# Altium PCB ZYNQ7020_AD9364_V2.PcbDoc (part 2 of 3)
Units mil, origin at the board's own origin, x right, y up, seen from the top; angles counter-clockwise.
Board outline 6000 x 4000 mil, 4 copper layers (Top Layer, Layer 1, Layer 2, Bottom Layer), stack 23.756 mil thick; 294 components, 275 nets, 1509 pads, 328 vias.
Unrouted connection lines stored in the file: 993.
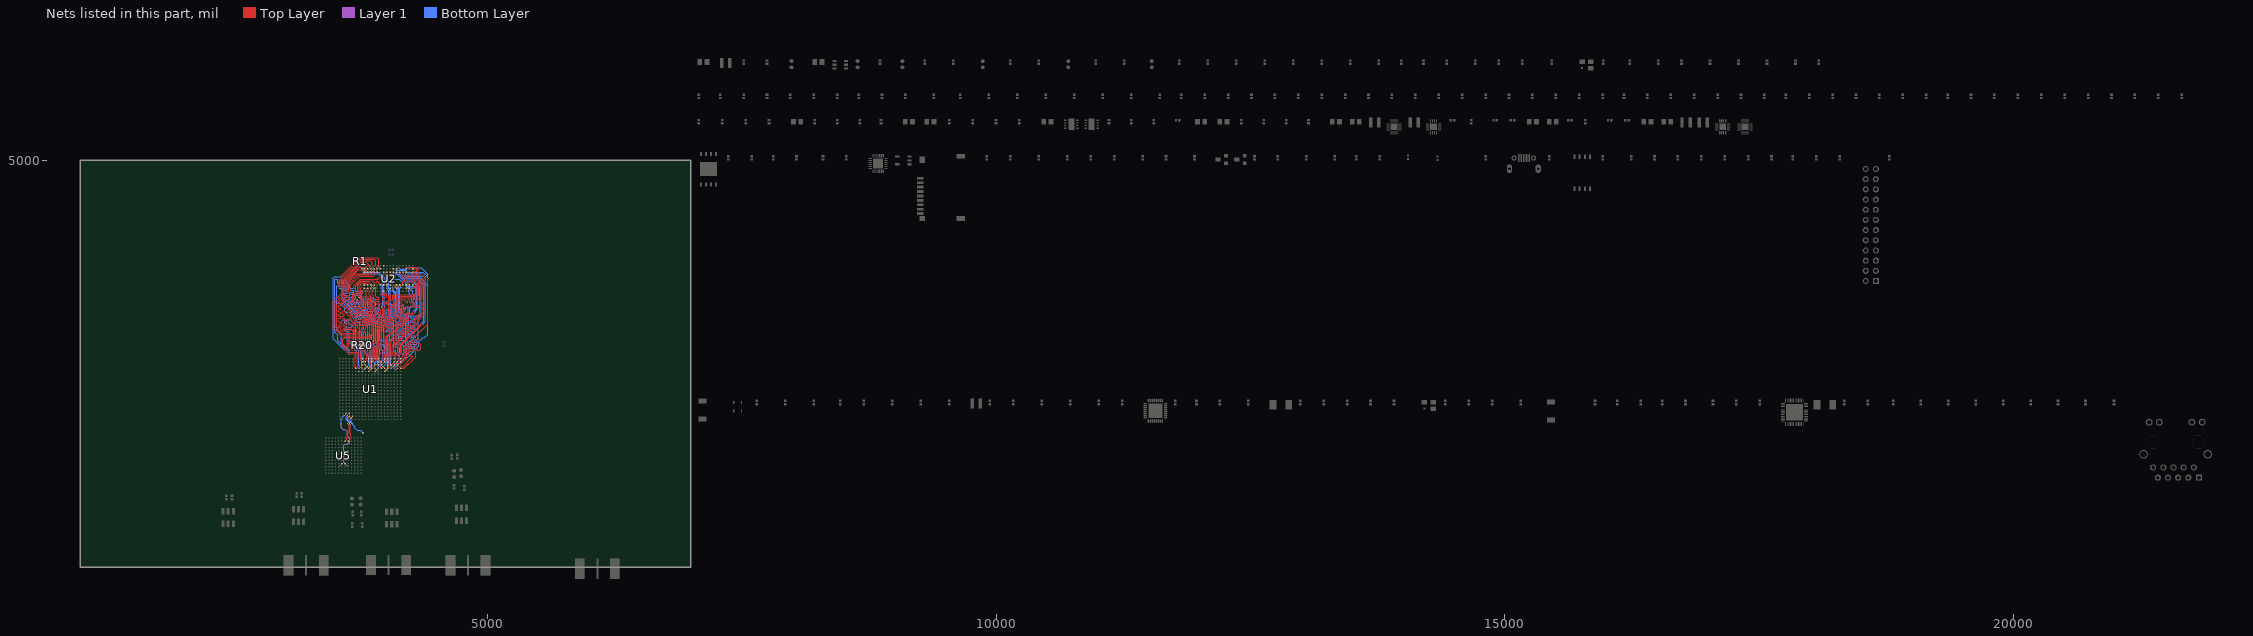
[diagram p3: the nets of this part, all layers, seen from the top]

## Via types
v1: diameter 17.72, hole 7.87, Top Layer to Bottom Layer, tented both sides, 194 vias
v2: diameter 16, hole 10, Top Layer to Bottom Layer, 118 vias
v3: diameter 19.68, hole 11.81, Top Layer to Bottom Layer, 16 vias

## Nets (pads, with @x,y where several pads share a name; then routed paths per layer and width w, separated by ;. In a path a pad name is that pad's centre, name@x,y a point inside that pad or via, vN(x,y) a via of type N, cw(c..) or ccw(c..) an arc to the next point about the centre after c; other vN are vias at no path point) (continued)
CTRL_OUT6: U1.T19 U5.F4 | length 260.3
  Top Layer w5: v1(3557.25,2005.28) U5.F4@3573,2021.03 ; v1(3661.64,2469.75) 3661.94,2469.75 3677.6,2485.4 U1.T19@3678.08,2485.4
  Bottom Layer w5: v1(3661.64,2469.75) 3662.6,2468.79 3662.6,2432.12 3681.93,2412.79 3681.93,2402.34 3685,2399.27 3685,2399 3700.72,2383.28 3700.72,2370.28 3725,2346 3756.7,2346 v1(3780.35,2322.35)
CTRL_OUT7: U1.V18 U5.G4 | length 653.6
  Top Layer w5: v1@3599.61,2501.42 U1.V18@3615.09,2516.9 ; U5.G4@3604.5,2021.03 v1(3620.25,2005.28)
  Layer 1 w5: v1@3565.07,2397.56 3565.07,2374.93 3585,2355 3615,2355 3624,2346 3624,2292.72 3648.72,2268 3648.72,2224.44 3643.27,2219 3637.27,2219 3627.27,2209 3600,2209 3591,2200 3591,2034.53 v1(3620.25,2005.28)
  Bottom Layer w5: v1(3565.36,2406.36) 3565,2406.72 3565,2466.64 v1(3599.61,2501.25)
DATA_CLK_N: U1.U19 U5.H11 | length 286.5
  Top Layer w5: v1@3631.11,2469.92 U1.U19@3646.59,2485.4 ; U5.H11@3635.99,2241.5 3654.41,2259.92 ; 3653.99,2259.92 3653.99,2286.51 3661.36,2293.88 3661.36,2307.36 3660.13,2308.59 3660.13,2308.87 3653,2316 3653,2404.71 3659,2410.71 v1(3659,2414)
  Bottom Layer w5: v1(3631.11,2469.75) 3631.11,2466.6 3624.97,2460.46 3624.97,2456.32 3635.52,2445.76 3640.74,2445.76 3653,2433.5 3653,2423.29 3659,2417.29 v1(3659,2414)
DATA_CLK_P: U1.U18 U5.G11 | length 323.9
  Top Layer w5: U5.G11@3604.5,2241.5 3604.5,2242.68 3620.41,2258.59 3620.41,2280.41 3630.41,2290.41 3630.41,2311.59 3643,2324.18 3643,2404.71 3637,2410.71 v1(3637,2414) ; v1@3631.11,2501.42 U1.U18@3646.59,2516.9
  Bottom Layer w5: v1(3631.11,2501.25) 3631.11,2498.21 3614.97,2482.07 3614.97,2452.17 3631.38,2435.76 3636.59,2435.76 3643,2429.36 3643,2423.29 3637,2417.29 v1(3637,2414)
DDR3_A0: U1.N2 U2.N3 | length 1612.3
  Top Layer w6: v2(3625.7,3115.85) 3626.69,3116.83 3740.86,3116.83 3756.62,3103.67 3756.62,3035.67 U1.N2@3770.49,3020.43 ; v2(3646.28,3789.98) 3730.92,3874.63 3859.86,3874.63 3889.39,3904.16 3887.42,3904.16 v2(3873.64,3917.93)
  Bottom Layer w6: v2@3626.69,3118.8 3626.69,3133.56 3530.23,3230.02 3530.23,3287.92 3504.55,3313.6 3504.55,3829.35 3508.48,3833.29 3525.21,3833.29 3531.12,3827.38 3531.12,3791.95 3535.06,3788.01 3543.92,3788.01 3549.82,3793.92 3549.82,3822.46 3555.73,3828.37 3565.57,3828.37 3570.49,3823.45 3570.49,3793.92 3576.4,3788.01 3586.24,3788.01 3591.16,3792.93 3591.16,3822.46 3596.08,3827.38 3608.88,3827.38 3611.83,3824.43 3611.83,3795.89 3618.72,3789 v2@3644.31,3789
DDR3_A1: U1.K2 U2.P7 | length 1564.4
  Top Layer w6: v2(3750.59,3480.35) 3739.76,3480.35 3716.14,3456.72 3716.14,3429.17 3713.19,3426.21 3697.44,3426.21 3690.55,3433.1 3690.55,3455.74 3724.02,3489.2 3724.02,3499.05 3718.11,3504.95 3706.3,3504.95 3673.82,3472.47 3664.96,3472.47 3657.09,3480.35 3657.09,3489.2 3689.57,3521.68 3689.57,3533.5 3683.66,3539.4 3673.82,3539.4 3643.31,3508.89 3632.48,3508.89 3624.61,3516.76 3624.61,3523.65 3654.13,3553.18 3654.13,3563.02 3649.21,3567.94 3638.39,3567.94 3615.75,3545.31 3603.94,3545.31 3597.05,3552.2 3597.05,3562.04 3630.51,3595.5 3647.24,3595.5 3681.69,3629.95 3681.69,3692.94 3685.63,3696.88 3716.14,3696.88 3729.92,3710.66 3729.92,3770.7 3764.37,3805.15 3829.33,3805.15 v2(3873.62,3760.86) ; U1.K2@3865.45,3020.43 3881.61,3036.59 3881.61,3215.26 v2(3866.85,3230.02)
  Bottom Layer w6: v2(3750.59,3480.35) 3781.1,3480.35 3866.73,3394.72 3866.73,3333.48 3866.85,3333.37 v2(3866.85,3230.02) ; v2(3873.62,3760.86) v2@3873.62,3761.84
DDR3_A2: U1.M3 U2.P3 | length 1620.5
  Top Layer w6: 3573.44,3412.03 3571.47,3410.06 ; v2@3576.4,3434.67 3576.4,3414.98 3571.47,3410.06 ; v2(3786.99,3003.43) 3801.65,2988.77 U1.M3@3802.01,2988.77 ; v2(3842.14,3917.93) 3855.92,3904.16 3857.89,3904.16 3839.19,3885.45 3716.16,3885.45 3624.62,3793.92 3624.62,3786.05 3640.37,3770.3 3640.37,3707.3 3652.18,3695.49 3652.18,3681.71 3645.29,3674.82 3624.62,3674.82 3620.69,3670.89 3620.69,3658.09 3623.64,3655.14 3640.37,3655.14 3645.29,3650.22 3645.29,3637.42 3642.34,3634.47 3624.62,3634.47 3564.58,3574.43 3541.95,3574.43 3535.06,3567.54 3535.06,3558.68 3540.96,3552.78 3555.73,3552.78 3560.65,3547.86 3560.65,3538.01 3554.74,3532.11 3541.95,3532.11 3535.06,3525.22 3535.06,3516.36 3539.98,3511.44 3553.76,3511.44 3559.66,3505.53 3559.66,3495.69 3553.76,3489.79 3539.98,3489.79 3535.06,3484.86 3535.06,3475.02 3539.98,3470.1 3554.74,3470.1 3559.66,3465.18 3559.66,3454.35 3555.73,3450.42 3539.98,3450.42 3535.06,3445.49 3535.06,3420.89 3545.88,3410.06 3571.47,3410.06
  Bottom Layer w6: v2@3581.32,3432.7 3597.07,3432.7 3601.99,3427.78 3601.99,3403.17 3605.92,3399.23 3616.75,3399.23 3622.66,3405.14 3622.66,3429.75 3627.58,3434.67 3657.1,3434.67 3707.3,3384.47 3707.3,3339.09 3707.26,3339.06 3707.26,3209.14 3771.24,3145.16 3771.24,3049.69 3787.97,3032.96 v2@3787.97,3004.41
  other v2: 3576.4,3433.68
DDR3_A3: U1.K3 U2.N2 | length 1674
  Top Layer w6: v2(3805.72,3314.48) 3804.73,3314.48 3776.19,3285.94 3560.64,3285.94 3489.77,3356.8 3489.77,3614.68 3575.4,3700.31 3575.4,3754.44 3564.58,3765.27 3564.58,3813.5 3766.35,4015.27 3850.99,4015.27 3873.63,3992.63 v2@3873.63,3950.31 ; v2(3806.67,3218.98) 3810.61,3215.04 3810.61,3160.91 3850.49,3122.46 3850.49,3005.46 U1.K3@3865.32,2988.77 ; v2(3872.74,3950.44) 3873.5,3950.44 v2@3873.63,3950.31 ; U2.N2@3889.38,3935.54 3874.62,3950.31 v2@3873.63,3950.31
  Bottom Layer w6: v2(3805.72,3314.48) 3805.72,3219.94 v2(3806.67,3218.98) ; v2@3871.66,3951.51 v2(3872.74,3950.44) v2@3873.63,3951.33
DDR3_A4: U1.M4 U2.P8 | length 1586
  Top Layer w6: v2(3646.26,3415.88) 3646.26,3440.49 3642.32,3444.43 3630.51,3444.43 3625.59,3439.5 3625.59,3419.82 3621.65,3415.88 3609.84,3415.88 3604.92,3420.8 3604.92,3444.43 3600,3449.35 3584.25,3449.35 3578.35,3455.25 3578.35,3465.09 3584.25,3471 3589.17,3471 3595.08,3476.91 3595.08,3486.75 3591.14,3490.68 3579.33,3490.68 3574.41,3495.61 3574.41,3516.28 3581.3,3523.17 3593.11,3523.17 3665.95,3450.33 3665.95,3428.68 3684.65,3409.98 3739.76,3409.98 3750.59,3420.8 3769.29,3420.8 3794.88,3395.21 3819.49,3395.21 3870.67,3446.39 3870.67,3652.1 3842.13,3680.65 v2(3842.13,3728.87) ; v2@3786,2940.28 3786,2941.16 v2(3786.66,2941.82) U1.M4@3802.01,2957.17 ; v2@3840.9,3727.65 3856.89,3743.64 U2.P8@3857.88,3743.64
  Bottom Layer w6: v2@3647.24,3413.91 3647.24,3390.29 3654.13,3383.4 3672.83,3383.4 3675.79,3380.45 3675.79,3363.72 3671.85,3359.78 3640.35,3359.78 3633.46,3352.89 3633.46,3342.06 3640.35,3335.17 3676.77,3335.17 3687.36,3324.58 3687.36,3208.21 3756.48,3139.1 3756.48,3034.77 3770.51,3020.74 3770.51,3008.28 3770.5,2957.98 v2(3786.66,2941.82)
DDR3_A5: U1.L1 U2.P2 | length 1580.2
  Top Layer w6: v2(3765.36,3315.46) 3750.6,3300.7 3565.56,3300.7 3505.52,3360.74 3505.52,3609.76 3517.33,3621.57 3525.21,3621.57 3538.98,3607.79 3548.83,3607.79 3554.73,3613.69 3554.73,3622.55 3540.95,3636.33 3540.95,3644.2 3548.83,3652.08 3555.72,3652.08 3575.4,3632.39 3583.28,3632.39 3589.18,3638.3 3589.18,3650.11 3571.47,3667.83 3571.47,3675.7 3590.17,3694.4 3590.17,3760.35 3579.34,3771.17 3579.34,3809.56 3769.3,3999.52 3814.58,3999.52 3842.13,3971.96 v2@3842.13,3949.32 ; v2(3827.23,3115.79) 3833.55,3109.47 U1.L1@3833.55,3052.8 ; v2@3841.15,3949.32 3854.93,3935.54 U2.P2@3857.88,3935.54
  Bottom Layer w6: v2(3765.36,3315.46) 3766.35,3314.48 3766.35,3250.78 3766.21,3250.64 3766.21,3211.27 3827.23,3150.24 v2(3827.23,3115.79)
  other v2: 3840.17,3949.32
DDR3_A6: U1.L4 U2.R8 | length 1608.4
  Top Layer w6: v2(3736.81,3440.49) 3769.29,3440.49 3798.82,3410.96 3815.55,3410.96 3855.91,3451.31 3855.91,3536.94 3850,3542.85 3836.22,3542.85 3830.32,3548.76 3830.32,3556.63 3837.2,3563.52 3848.03,3563.52 3855.91,3571.39 3855.91,3580.25 3850.98,3585.17 3837.2,3585.17 3831.3,3591.08 3831.3,3601.91 3836.22,3606.83 3850.98,3606.83 3855.91,3611.75 3855.91,3650.13 3845.08,3660.96 3824.41,3660.96 3807.51,3677.86 3807.51,3695.27 3810.63,3698.38 v2(3810.63,3729.86) 3824.41,3743.64 U2.R8@3826.38,3743.64 ; v2@3818.48,2971.78 3833.09,2957.17 U1.L4@3833.66,2957.17
  Bottom Layer w6: v2@3738.78,3437.54 3738.78,3444.42 3585.24,3597.97 3575.39,3597.97 3568.5,3591.08 3568.5,3582.22 3600.98,3549.74 3600.98,3515.29 3607.87,3508.4 3650.2,3508.4 3676.77,3481.83 3676.77,3462.14 3682.68,3456.24 3706.3,3456.24 3712.2,3450.33 3712.2,3423.76 3722.05,3413.91 3741.73,3413.91 3746.65,3408.99 3746.65,3378.48 ; 3746.63,3378.46 3746.63,3208.98 3802.74,3152.88 3802.74,3109.57 3838.17,3074.14 3838.17,2991.46 v2@3818.48,2971.78
  other v2: 3819.47,2969.81
DDR3_A7: U1.K4 U2.R2 | length 1567.5
  Top Layer w6: v2(3765.36,3400.11) 3761.43,3396.17 3552.76,3396.17 3544.89,3388.3 3544.89,3358.77 3540.95,3354.83 3531.11,3354.83 3520.28,3365.66 3520.28,3585.15 3530.13,3594.99 3564.58,3594.99 3604.93,3635.35 3604.93,3722.94 3609.85,3727.87 3609.85,3750.5 3603.95,3756.41 3603.95,3765.27 3595.09,3774.13 3595.09,3803.65 3741.43,3950 3788,3950 3788.25,3949.75 3809.1,3949.75 v2(3809.65,3950.31) 3824.42,3935.54 U2.R2@3826.39,3935.54 ; v2(3849,2971.78) 3850.71,2971.78 U1.K4@3865.31,2957.17
  Bottom Layer w6: v2@3768.32,3397.16 3781.02,3384.45 3785.02,3380.45 3785.02,3296.61 3785.13,3296.5 3785.13,3280.91 3785.02,3280.8 3785.02,3257.24 3785.13,3257.13 3785.13,3241.54 3785.02,3241.43 3785.02,3211.93 3849.98,3146.97 3849.98,2972.76 v2(3849,2971.78)
DDR3_A8: U1.K1 U2.T8 | length 1586.6
  Top Layer w6: v2@3776.18,3460.17 3784.06,3452.3 3792.91,3452.3 3798.82,3446.39 3798.82,3429.66 3802.76,3425.72 3812.6,3425.72 3815.55,3428.68 3815.55,3446.39 3820.47,3451.31 3837.2,3451.31 3841.14,3455.25 3841.14,3471 3835.24,3476.91 3774.21,3476.91 3770.28,3480.84 3770.28,3491.67 3773.23,3494.62 3834.25,3494.62 3839.17,3499.54 3839.17,3510.37 3835.24,3514.31 3779.13,3514.31 3774.21,3519.23 3774.21,3530.05 3779.13,3534.98 3807.68,3534.98 3814.57,3541.87 3814.57,3552.69 3809.65,3557.61 3742.72,3557.61 3740.75,3559.58 3735.83,3564.5 3735.83,3571.39 3743.7,3579.27 3810.63,3579.27 3814.57,3583.2 3814.57,3596.98 3811.61,3599.94 3741.73,3599.94 3736.81,3604.86 3736.81,3612.73 3744.69,3620.61 3836.22,3620.61 3840.16,3624.54 3840.16,3637.34 3835.24,3642.26 3811.61,3642.26 3809.65,3644.23 3809.65,3657.02 3800.79,3665.88 3790.95,3665.88 3785.04,3659.98 3785.04,3640.29 3780.12,3635.37 3767.32,3635.37 3760.43,3642.26 3760.43,3665.88 3775.03,3680.48 3775.03,3723.79 3776.18,3724.94 3776.18,3726.91 v2(3778.15,3728.87) 3792.91,3743.64 U2.T8@3794.88,3743.64 ; v2(3845.93,3211.27) 3856.76,3211.27 3864.63,3203.39 3864.63,3189.61 3856.76,3181.74 3831.17,3181.74 3825.26,3175.83 3825.26,3168.94 3832.15,3162.05 3860.7,3162.05 3865.2,3157.55 U1.K1@3865.2,3052.8
  Bottom Layer w6: v2@3776.77,3459.59 3846.06,3390.29 3846.06,3288.91 3845.93,3288.78 v2(3845.93,3211.27)
  other v2: 3775.2,3461.16
DDR3_A9: U1.J4 U2.R3 | length 1583
  Top Layer w6: v2(3625.61,3695.49) 3625.61,3764.39 3609.86,3780.14 3609.86,3798.84 3735.84,3924.82 3754.55,3924.82 3761.44,3917.93 v2(3810.65,3917.93) 3824.43,3904.16 U2.R3@3826.4,3904.16 ; v2@3882.46,2970.79 3896.08,2957.17 U1.J4@3896.97,2957.17
  Bottom Layer w6: v2@3624.62,3693.53 3598.05,3693.53 3590.18,3685.65 3590.18,3677.78 3594.11,3673.84 3641.36,3673.84 3646.28,3668.92 3646.28,3658.09 3641.36,3653.17 3599.03,3653.17 3592.14,3646.28 3592.14,3636.44 3612.81,3615.77 3624.62,3615.77 3668.92,3660.06 3674.82,3660.06 3682.7,3652.19 3682.7,3645.3 3636.44,3599.04 3636.44,3588.21 3690.57,3534.08 3707.3,3534.08 3712.22,3529.16 3712.22,3513.41 3726,3499.63 3787.03,3499.63 3886.44,3400.22 3886.44,3326.13 3886.4,3326.1 3886.4,3198.16 3882.46,3194.22 3882.46,3027.88 3898,3012.34 3898,2987.32 v2@3880.49,2969.81 ; v2@3807.7,3917.93 v2@3807.7,3921.87
  other v2: 3881.48,2971.78
DDR3_A10: U1.F5 U2.L7 | length 1581.4
  Top Layer w6: v2(3710.24,3715.58) 3710.24,3768.73 3759.45,3817.94 3886.42,3817.94 3893.31,3811.05 3893.31,3800.23 3898.23,3795.31 3908.07,3795.31 3913.98,3801.21 3913.98,3811.05 3918.9,3815.98 3930.71,3815.98 v2(3935.63,3820.9) 3935.63,3793.34 U2.L7@3952.36,3776.61 ; U1.F5@3991.83,2926.04 4006.39,2940.6 v2(4007.37,2940.6)
  Bottom Layer w6: v2@3715.16,3714.6 3716.14,3713.61 3772.24,3713.61 3776.18,3709.68 3776.18,3699.83 3770.28,3693.93 3713.19,3693.93 3707.28,3688.02 3707.28,3679.17 3711.22,3675.23 3758.47,3675.23 3767.32,3666.37 3767.32,3644.72 3772.24,3639.8 3901.18,3639.8 3908.07,3632.91 3908.07,3622.08 3902.17,3616.17 3893.31,3616.17 3886.42,3609.28 3886.42,3605.35 3892.32,3599.44 3903.15,3599.44 3906.1,3596.49 3906.1,3582.71 3891.34,3567.94 3891.34,3524.64 3967.13,3448.85 3967.13,3289.4 3967.02,3289.29 3967.02,3239.81 4022.13,3184.7 4022.13,2954.38 v2@4007.37,2939.62 ; v2@3932.68,3821.88 v2@3932.68,3822.87
DDR3_A11: U1.G4 U2.R7 | length 1517.8
  Top Layer w6: v2(3721.06,3628.97) 3721.06,3617.16 3695.47,3591.57 3695.47,3578.77 3760.43,3513.81 3760.43,3502.98 3755.51,3498.06 3742.72,3498.06 3665.95,3574.83 3665.95,3590.58 3695.47,3620.11 3695.47,3673.26 3703.35,3681.13 3726.97,3681.13 3745.67,3699.83 3745.67,3761.84 v2(3764.37,3780.54) 3778.15,3794.32 3808.21,3794.32 U2.R7@3826.53,3776 ; v2(3944.47,2971.78) 3959.08,2957.17 U1.G4@3960.27,2957.17
  Bottom Layer w6: v2(3721.06,3628.97) 3731.89,3618.14 3731.89,3590.58 3737.8,3584.68 3749.61,3584.68 3751.58,3586.65 3751.58,3604.36 3757.48,3610.27 3765.35,3610.27 3772.24,3603.38 3772.24,3560.07 3759.45,3547.28 3759.45,3535.46 3765.35,3529.56 3795.87,3529.56 3925.79,3399.64 3925.79,3215.85 3936.59,3205.05 3936.59,3169.61 3976.95,3129.26 3976.95,3033.79 3960.22,3017.05 3960.22,2986.54 3945.45,2971.78 v2(3944.47,2971.78)
DDR3_A12: U1.E4 U2.N7 | length 1621.4
  Top Layer w6: U2.N7@3889.37,3776.61 3905.12,3760.86 3905.12,3696.87 3904.87,3696.62 3904.87,3683.36 3905.12,3683.11 3905.12,3666.37 3915.95,3655.54 3931.69,3655.54 3935.63,3651.61 3935.63,3638.81 3932.68,3635.86 3910.04,3635.86 3905.12,3630.94 3905.12,3621.09 3910.04,3616.17 3934.65,3616.17 3940.55,3610.27 3940.55,3599.44 3936.61,3595.5 3925.79,3595.5 3920.87,3590.58 v2(3920.87,3575.82) ; U1.E4@4023.57,2957.17 4024.35,2957.17 v2(4038.96,2971.78)
  Bottom Layer w6: v2(3905.12,3759.87) v2@3905.12,3761.84 ; v2@3923.82,3575.82 3935.63,3575.82 3941.54,3569.91 3941.54,3557.12 3938.58,3554.17 3910.04,3554.17 3906.1,3550.23 3906.1,3530.54 3922.84,3513.81 3931.69,3513.81 3936.61,3518.73 3936.61,3534.48 3941.54,3539.4 3952.36,3539.4 3956.3,3535.46 3956.3,3488.22 3960.24,3484.28 3971.06,3484.28 3976.97,3490.19 3976.97,3533.5 3982.87,3539.4 3990.75,3539.4 3996.65,3533.5 3996.65,3499.05 4000.59,3495.11 4009.45,3495.11 4016.34,3502 4016.34,3540.39 4020.28,3544.32 4029.13,3544.32 4036.02,3537.43 4036.02,3484.28 4027.17,3475.42 3985.83,3475.42 3980.91,3470.5 3980.91,3459.68 3985.83,3454.76 4037.01,3454.76 4042.91,3448.85 4042.91,3439.99 4037.01,3434.09 3985.83,3434.09 3981.89,3430.15 3981.89,3419.32 3985.83,3415.39 4047.84,3415.39 4050.79,3412.43 4050.79,3398.65 4046.85,3394.72 3993.7,3394.72 3985.83,3386.84 3985.83,3241.44 4038.96,3188.31 v2(4038.96,2971.78)
DDR3_A13: U1.D4 U2.T3 | length 1611.2
  Top Layer w6: v2@3775.21,3902.19 v2(3777.18,3902.19) 3792.93,3902.19 U2.T3@3794.9,3904.16 ; U1.D4@4055.22,2957.17 4055.84,2957.17 v2(4070.45,2971.78)
  Bottom Layer w6: v2@3776.69,3901.69 3791.95,3886.44 3929.74,3886.44 4016.36,3799.82 4016.36,3733.88 4031.12,3719.12 4031.12,3616.75 4027.18,3612.82 4009.47,3612.82 4006.51,3609.86 4006.51,3596.08 4013.4,3589.19 4031.12,3589.19 4051.79,3568.53 4051.79,3461.24 4066.55,3446.48 4066.55,3382.5 4060.65,3376.6 4014.39,3376.6 4005.53,3367.74 4005.53,3360.85 4011.44,3354.94 4062.62,3354.94 4066.55,3351.01 4066.55,3340.18 4061.63,3335.26 4014.39,3335.26 4007.5,3328.37 4007.5,3318.53 4011.44,3314.59 4060.65,3314.59 4065.57,3309.67 4065.57,3231.91 4063.6,3229.94 4050.81,3229.94 4044.9,3235.85 4044.9,3282.11 4038.01,3289 4023.74,3289 4006.48,3271.73 4006.48,3250.32 4052.74,3204.06 4052.74,2989.49 v2(4070.45,2971.78)
DDR3_A14: U1.F4 U2.T7 | length 1589.4
  Top Layer w6: v2(3740.75,3656.53) 3740.75,3671.29 3759.45,3689.99 3759.45,3743.14 v2(3778.15,3761.84) 3792.91,3776.61 U2.T7@3794.88,3776.61 ; v2(3976.95,2971.78) 3977.31,2971.78 U1.F4@3991.92,2957.17
  Bottom Layer w6: v2@3741.73,3654.56 3741.73,3649.64 3767.32,3624.05 3781.1,3624.05 3786.02,3619.13 3786.02,3552.2 3791.93,3546.29 3802.76,3546.29 3807.68,3551.21 3807.68,3615.19 3815.55,3623.06 3824.41,3623.06 3829.33,3618.14 3829.33,3564.99 3833.27,3561.05 3845.08,3561.05 3850.98,3566.96 3850.98,3620.11 3856.89,3626.02 3866.73,3626.02 3871.65,3621.09 3871.65,3548.26 3867.72,3544.32 3825.39,3544.32 3821.46,3540.39 3821.46,3524.64 3826.38,3519.72 3871.65,3519.72 3877.56,3513.81 3877.56,3503.97 3863.78,3490.19 3863.78,3483.3 3871.65,3475.42 3877.56,3475.42 3895.28,3493.14 3904.13,3493.14 3910.04,3487.24 3910.04,3478.38 3893.31,3461.65 3893.31,3451.8 3898.23,3446.88 3908.07,3446.88 3923.82,3462.63 3933.66,3462.63 3941.54,3454.76 3941.54,3449.83 3922.84,3431.13 3922.84,3423.26 3931.69,3414.4 3947.44,3414.4 3952.36,3409.48 3952.36,3384.87 3946.46,3378.97 3946.46,3338.92 3946.44,3236.54 3964.15,3218.82 3964.15,3208 3952.34,3196.19 3952.34,3174.53 3958.25,3168.63 3964.15,3168.63 3966.12,3170.6 3966.12,3184.38 3975.96,3194.22 3987.77,3194.22 4006.48,3175.52 4006.48,3003.27 v2@3977.93,2974.73 ; v2@3777.17,3760.86 v2(3778.15,3761.84)
DDR3_BA0: U1.L5 U2.M2 | length 1583
  Top Layer w6: v2(3554.73,3744.6) 3548.83,3750.5 3548.83,3818.42 3759.46,4029.05 3891.35,4029.05 3905.13,4015.27 v2(3905.13,3950.31) 3919.89,3935.54 U2.M2@3920.88,3935.54 ; U1.L5@3833.57,2926.04 3834.35,2926.04 v2(3849.89,2941.59)
  Bottom Layer w6: v2@3552.76,3743.61 3570.48,3743.61 3575.4,3738.69 3575.4,3629.44 3825.4,3379.44 3825.4,3378.46 3826.27,3377.59 3826.27,3198.47 3864.91,3159.84 3864.91,2956.6 v2(3849.89,2941.59)
DDR3_BA1: U1.R4 U2.N8 | length 1561.8
  Top Layer w6: v2(3630.51,3375.53) 3565.55,3375.53 3559.65,3369.62 3559.65,3330.25 3569.49,3320.41 3582.28,3320.41 3585.24,3323.36 3585.24,3346 3594.09,3354.86 3665.95,3354.86 3671.85,3360.76 3671.85,3375.53 3675.79,3379.46 3683.66,3379.46 3689.57,3373.56 3689.57,3358.8 3692.52,3355.84 3702.36,3355.84 3709.25,3362.73 3709.25,3374.54 3716.14,3381.43 3724.02,3381.43 3730.91,3374.54 3730.91,3356.83 3735.83,3351.91 3746.65,3351.91 3750.59,3355.84 3750.59,3375.53 3755.51,3380.45 3826.38,3380.45 3897.24,3451.31 3897.24,3460.17 3889.37,3468.05 3889.37,3477.89 3902.17,3490.68 3935.63,3490.68 3940.55,3495.61 3940.55,3506.43 3935.63,3511.35 3890.35,3511.35 3885.43,3516.28 3885.43,3526.12 3891.34,3532.02 3919.88,3532.02 3926.77,3538.91 3926.77,3546.79 3920.87,3552.69 3905.12,3552.69 3896.26,3561.55 3896.26,3603.87 3885.43,3614.7 3885.43,3669.82 3873.62,3681.63 v2(3873.62,3729.86) 3875.59,3729.86 U2.N8@3889.37,3743.64 ; U1.R4@3707.06,2957.17 3693.49,2972.31 3693.49,3061.31 3711.2,3081.03 v2(3716.12,3081.03)
  Bottom Layer w6: v2(3630.51,3375.53) 3606.87,3351.88 3606.87,3337.92 3625.57,3319.22 3625.57,3224.73 3716.12,3134.18 v2(3716.12,3081.03) ; v2@3872.64,3729.86 v2(3873.62,3729.86)
DDR3_BA2: U1.J5 U2.M3 | length 1639.3
  Top Layer w6: v2(3661.04,3725.02) 3656.12,3729.94 3656.12,3775.22 3743.72,3862.82 3879.55,3862.82 3920.88,3904.16 3919.9,3904.16 v2(3905.14,3918.92) ; U1.J5@3896.88,2926.04 3898.33,2926.04 v2(3912.88,2940.6)
  Bottom Layer w6: v2@3664.98,3723.05 3688.6,3723.05 3691.55,3720.1 3691.55,3710.26 3685.65,3704.35 3652.18,3704.35 3646.28,3698.45 3646.28,3690.57 3652.18,3684.67 3687.62,3684.67 3691.55,3680.73 3691.55,3669.9 3707.3,3654.16 3707.3,3644.31 3659.07,3596.08 3659.07,3589.19 3667.93,3580.34 3673.84,3580.34 3702.38,3608.88 3712.22,3608.88 3719.11,3601.99 3719.11,3590.18 3696.47,3567.54 3696.47,3561.64 3704.35,3553.76 3714.19,3553.76 3731.91,3571.48 3742.73,3571.48 3749.62,3564.59 3749.62,3553.76 3726.99,3531.12 3726.99,3519.31 3732.89,3513.41 3792.93,3513.41 3906.12,3400.22 3906.12,3379.55 3905.99,3379.42 3905.99,3216.19 3918.79,3203.4 3918.79,3158.12 3925.68,3151.23 3925.68,3113.83 3918.79,3106.94 3918.79,3078.4 3928.63,3068.55 3928.63,2956.35 v2@3910.91,2938.63
DDR3_CAS: U1.P5 U2.K3
DDR3_CK_N: R20.2 U1.M2 U2.K7 | length 1532.1
  Top Layer w6: R20.2@3749.72,3195.57 3756.61,3195.57 3763.5,3202.46 3763.5,3217.22 3757.59,3223.13 3729.05,3223.13 3721.18,3215.26 3721.18,3174.9 3706.41,3160.14 3683.77,3160.14 3670.98,3172.93 3670.98,3214.27 3665.07,3220.18 3647.36,3220.18 3639.48,3212.3 3639.48,3175.89 3624.72,3161.12 3595.19,3161.12 3570.59,3185.73 3570.59,3245.77 3594.21,3269.39 3845.19,3269.39 3867.83,3292.03 3867.83,3372.74 3975.11,3480.02 3975.11,3549.9 v2(3965.27,3559.74) ; R20.2@3752.67,3191.63 3752.67,3184.74 3768.42,3169 3768.42,3136.51 3792.04,3112.89 3792.04,3089.27 3787.62,3082.67 3787.62,3037.67 U1.M2@3802.14,3020.43 ; v2@3967.24,3792.03 v2(3968.22,3792.03) U2.K7@3983.97,3776.28
  Bottom Layer w6: v2@3964.29,3559.74 3976.1,3571.55 3976.1,3693.6 3968.22,3701.47 v2(3968.22,3792.03)
DDR3_CK_P: R20.1 U1.L2 U2.J7 | length 1544.6
  Top Layer w6: R20.1@3789.09,3193.6 3789.09,3176.87 3780.23,3168.01 3780.23,3145.37 3805.82,3119.78 3805.82,3097.14 3818.87,3084.1 3818.87,3066.9 3818.62,3066.64 3818.62,3035.6 U1.L2@3833.8,3020.43 ; R20.1@3789.09,3195.57 3775.31,3209.35 3775.31,3223.13 3761.53,3236.91 3723.14,3236.91 3708.38,3222.14 3708.38,3178.84 3701.49,3171.95 3691.65,3171.95 3685.74,3177.85 3685.74,3219.19 3670.98,3233.96 3640.47,3233.96 3625.7,3219.19 3625.7,3180.81 3618.81,3173.92 3601.1,3173.92 3583.38,3191.63 3583.38,3239.86 3599.13,3255.61 3851.1,3255.61 3880.62,3285.14 3880.62,3366.83 3988.89,3475.1 3988.89,3548.92 v2(4000.7,3560.73) ; v2@3999.72,3793.01 3999.72,3792.03 U2.J7@4015.47,3776.28
  Bottom Layer w6: v2@3998.74,3790.06 3981.02,3772.34 3981.02,3707.38 3988.89,3699.51 3988.89,3572.54 v2(4000.7,3560.73)
  other v2: 3998.74,3791.04
DDR3_CKE: U1.N3 U2.K9 | length 1602.9
  Top Layer w6: v2@3646.28,3320.71 3604.94,3320.71 3601,3324.64 3601,3333.5 3607.89,3340.39 3677.77,3340.39 3680.73,3337.44 3680.73,3321.69 3686.63,3315.78 3696.47,3315.78 3701.4,3320.71 3701.4,3336.45 3707.3,3342.36 3716.16,3342.36 3721.08,3337.44 3721.08,3320.71 3726,3315.78 3737.81,3315.78 3741.75,3319.72 3741.75,3327.6 3750.61,3336.45 3760.45,3336.45 3766.36,3342.36 3766.36,3355.15 3772.26,3361.06 3781.12,3361.06 3784.07,3358.11 3784.07,3344.33 3792.93,3335.47 3799.82,3335.47 3805.73,3341.37 3805.73,3362.04 3809.66,3365.98 3821.47,3365.98 3825.41,3362.04 3825.41,3301.02 3830.33,3296.1 3841.16,3296.1 3846.08,3301.02 3846.08,3380.74 3956.32,3490.98 3956.32,3529.37 3941.55,3544.13 3941.55,3582.52 3950.41,3591.37 4011.44,3591.37 4015.37,3595.31 4015.37,3604.17 4006.51,3613.03 3980.92,3613.03 3974.03,3619.92 3974.03,3645.51 3981.91,3653.38 4006.51,3653.38 4011.44,3658.3 4011.44,3691.77 4006.51,3696.69 3998.64,3696.69 3991.75,3689.8 3991.75,3679.96 3986.83,3675.04 3962.22,3675.04 3956.32,3680.94 v2(3956.32,3685.86) U2.K9@3983.88,3713.42 ; v2@3755.36,2971.58 U1.N3@3770.23,2986.44
  Bottom Layer w6: v2@3646.28,3316.77 3646.28,3288.23 3646.11,3288.06 3646.11,3226.5 3736.66,3135.95 3736.66,2988.31 v2@3751.92,2973.05
  other v2: 3754.36,2973.13 3646.28,3318.74
DDR3_CS: U1.N1 U2.L2 | length 1624
  Top Layer w6: v2(3565.56,3859.76) 3749.61,4043.81 3920.87,4043.81 3937.36,4027.32 3937.36,3948.58 3950.4,3935.54 U2.L2@3952.37,3935.54 ; v2(3600.85,3135.48) 3602.82,3137.45 3741.6,3137.45 3770.25,3108.8 U1.N1@3770.25,3052.8
  Bottom Layer w6: v2(3565.56,3859.76) 3563.59,3857.79 3503.55,3857.79 3489.77,3844.01 3489.77,3245.58 3595.93,3139.42 v2@3596.92,3139.42
  other v2: 3937.61,3948.34
DDR3_DM0: U1.A1 U2.E7 | length 1291.7
  Top Layer w6: U2.E7@4141.49,3776 4156.25,3761.24 v2(4157.24,3761.24) ; U1.A1@4150.35,3051.59 4181.84,3083.09 4181.84,3165.76 v2(4240.9,3224.82)
  Bottom Layer w6: v2@4156.25,3757.3 4141.49,3742.54 4141.49,3525.02 4176.92,3489.58 4213.34,3489.58 4228.1,3474.82 4228.1,3375.41 4235.98,3367.54 4284.2,3367.54 4293.06,3358.68 4293.06,3350.8 4286.17,3343.91 4234.99,3343.91 4228.1,3337.02 4228.1,3327.18 4233.02,3322.26 4284.2,3322.26 4291.09,3315.37 4291.09,3306.51 4285.19,3300.61 4234.01,3300.61 4229.09,3295.68 4229.09,3283.87 4234.01,3278.95 4293.06,3278.95 4297,3275.02 4297,3264.19 4293.06,3260.25 4259.6,3260.25 4252.71,3253.36 4252.71,3243.52 4257.63,3238.6 4305.86,3238.6 4313.73,3230.72 4313.73,3218.91 4308.81,3213.99 4251.72,3213.99 v2(4240.9,3224.82)
DDR3_DM1: U1.F1 U2.D3 | length 1265.2
  Top Layer w6: U1.F1@3992.36,3051.67 3992.36,3096.17 4036.45,3140.25 4036.45,3224.9 4113.22,3301.67 4142.75,3301.67 4335.66,3494.58 4335.66,3550.68 4329.76,3556.59 4292.35,3556.59 4286.45,3562.5 4286.45,3572.34 4290.38,3576.27 4328.77,3576.27 4335.66,3583.16 4335.66,3624.5 4360.27,3649.11 v2@4360.27,3847.93 ; U2.D3@4173.26,3904.03 4188.02,3889.27 v2(4188.02,3886.31)
  Bottom Layer w6: v2(4188.02,3886.31) 4190.98,3886.31 4210.66,3866.63 4346.49,3866.63 v2@4363.22,3849.9
  other v2: 4362.24,3848.91
DDR3_DQ0: U1.C3 U2.E3 | length 1299.4
  Top Layer w6: U1.C3@4086.88,2988.77 4102.73,2972.92 v2(4102.93,2972.92) ; U2.E3@4141.32,3904.02 4141.32,3903.03 v2(4157.07,3887.29)
  Bottom Layer w6: v2@4105.89,2974.88 4106.87,2974.88 4199.39,3067.4 4220.06,3067.4 4330.3,3177.64 4330.3,3218.98 4366.71,3255.4 4383.45,3255.4 4415.93,3287.88 4415.93,3770.16 4331.28,3854.81 4189.55,3854.81 v2(4157.07,3887.29)
DDR3_DQ1: U1.B3 U2.F7 | length 1281.7
  Top Layer w6: U2.F7@4109.82,3776.07 4124.59,3761.3 v2(4125.57,3761.3) ; U1.B3@4118.53,2988.77 4134.38,2972.92 4176.75,2972.92 4217.11,3013.27 4217.11,3021.14 4249.59,3053.62 4259.43,3053.62 4266.32,3060.51 4266.32,3072.33 4262.38,3076.26 4248.6,3076.26 4226.95,3097.92 4226.95,3131.38 4266.32,3170.75 4281.08,3170.75 4315.53,3136.3 4334.23,3136.3 4346.04,3148.11 4346.04,3197.33 4338.17,3205.2 4315.53,3205.2 4296.83,3186.5 v2(4296.83,3185.51)
  Bottom Layer w6: v2(4125.57,3761.3) 4130.49,3756.38 4130.49,3505.4 4161.99,3473.9 4199.39,3473.9 4213.17,3460.12 4213.17,3208.15 4226.95,3194.37 4287.97,3194.37 v2(4296.83,3185.51)
DDR3_DQ2: U1.A2 U2.F2 | length 1323.6
  Top Layer w6: U2.F2@4109.96,3935.73 4112.08,3935.73 4126.69,3950.34 v2(4126.69,3950.49) ; U1.A2@4150.31,3020.43 4150.31,3025.29 4197.55,3072.54 4197.55,3152.26 4281.22,3235.92 4281.22,3255.61 4417.36,3391.76 4417.36,3837.97 v2(4416.06,3839.27)
  Bottom Layer w6: v2@4127.67,3950.49 4146.37,3931.79 4195.59,3931.79 4210.35,3946.55 4354.05,3946.55 4417.04,3883.56 v2@4417.04,3842.22
DDR3_DQ3: U1.A4 U2.F8 | length 1283.4
  Top Layer w6: v2(4095.06,3761.15) 4109.82,3746.38 U2.F8@4109.82,3743.43 ; U1.A4@4150.18,2957.17 4186.75,2957.17 4296.83,3067.25 4296.83,3118.43 4274.19,3141.07 4261.4,3141.07 v2(4246.63,3126.3)
  Bottom Layer w6: v2@4098.01,3758.19 4117.7,3738.51 4117.7,3493.43 4151.16,3459.97 4182.66,3459.97 4198.4,3444.22 4198.4,3180.44 4203.33,3175.52 4282.07,3175.52 4287.97,3169.61 4287.97,3160.75 4281.08,3153.86 4204.31,3153.86 4197.42,3146.97 4197.42,3100.71 4204.31,3093.82 4217.11,3093.82 4246.63,3123.35 v2(4246.63,3126.3)
DDR3_DQ4: U1.D3 U2.H3 | length 1328.7
  Top Layer w6: U2.H3@4046.83,3904.02 4046.83,3864.65 v2(4061.6,3849.88) ; U1.D3@4055.22,2988.77 4070.87,3004.41 4161,3004.41 4211.2,3054.61 4211.2,3140.24 4319.47,3248.51 v2(4321.44,3248.51)
  Bottom Layer w6: v2(4061.6,3849.88) 4077.34,3834.14 4138.37,3834.14 4162.97,3809.53 4286.99,3809.53 4351.95,3744.57 4351.95,3479.81 4321.44,3449.29 4321.44,3249.49 v2@4323.41,3247.52
DDR3_DQ5: U1.D1 U2.H8 | length 1283.6
  Top Layer w6: U2.H8@4047.28,3743.6 4048.26,3743.6 v2(4063.02,3728.83) ; U1.D1@4055.67,3051.67 4055.67,3073.84 4102.39,3120.57 v2(4102.39,3150.09)
  Bottom Layer w6: v2@4064.01,3730.8 4064.01,3721.94 4086.64,3699.31 4086.64,3470.96 4108.3,3449.31 4108.3,3235.72 4113.22,3230.8 4177.2,3230.8 4183.1,3224.9 4183.1,3213.09 4178.18,3208.16 4101.41,3208.16 4097.47,3204.23 4097.47,3193.4 4101.41,3189.46 4172.27,3189.46 4183.1,3178.64 4183.1,3095.96 4177.2,3090.05 4169.32,3090.05 4161.45,3097.93 4161.45,3160.92 4155.54,3166.83 4150.62,3166.83 4142.75,3158.95 4142.75,3114.66 4137.83,3109.74 4129.95,3109.74 4123.06,3116.63 4123.06,3162.89 4119.12,3166.83 4109.28,3166.83 4102.39,3159.94 v2(4102.39,3150.09)
DDR3_DQ6: U1.C1 U2.G2 | length 1293.7
  Top Layer w6: U2.G2@4078.77,3935.53 v2(4095.5,3918.79) ; U1.C1@4087.32,3051.67 4087.32,3085.81 4127.98,3126.47 4127.98,3212.1 4311.05,3395.17 4311.05,3415.84 4395.7,3500.49 v2(4395.7,3868.6)
  Bottom Layer w6: v2(4095.5,3918.79) 4198.85,3918.79 4215.58,3902.06 4365.19,3902.06 v2@4399.64,3867.61
DDR3_DQ7: U1.E1 U2.H7 | length 1330.2
  Top Layer w6: U1.E1@4024.02,3051.67 4024.02,3082.54 4066.96,3125.49 4066.96,3185.53 4071.88,3190.45 4087.63,3190.45 4092.55,3195.37 4092.55,3205.21 4084.68,3213.09 4084.68,3218.99 4121.09,3255.41 v2(4126.01,3255.41) ; U2.H7@4047.28,3776.08 4048.26,3776.08 v2(4063.02,3761.31)
  Bottom Layer w6: v2(4063.02,3761.31) 4079.02,3745.31 4079.02,3722.69 4088.88,3712.83 4089.85,3712.83 4102.39,3700.29 4102.39,3484.74 4142.75,3444.39 4175.23,3444.39 4183.1,3436.51 4183.1,3426.67 4178.18,3421.75 4129.95,3421.75 4123.06,3414.86 4123.06,3405.01 4127.98,3400.09 4177.2,3400.09 4183.1,3394.19 4183.1,3386.31 4177.2,3380.41 4129.95,3380.41 4123.06,3373.52 4123.06,3365.64 4130.94,3357.77 4176.21,3357.77 4182.12,3351.87 4182.12,3343.99 4174.24,3336.12 4128.97,3336.12 4124.05,3331.2 4124.05,3320.37 4127.98,3316.43 4177.2,3316.43 4182.12,3311.51 4182.12,3299.7 4177.2,3294.78 4127.98,3294.78 4123.06,3289.86 4123.06,3281 4129.95,3274.11 4176.21,3274.11 4178.18,3272.14 4178.18,3259.35 4172.27,3253.44 4127.98,3253.44 v2(4126.01,3255.41)
DDR3_DQ8: U1.E2 U2.D7 | length 1288.5
  Top Layer w6: U1.E2@4023.7,3020.43 4022.31,3020.43 4007.59,3035.14 4007.59,3087.3 4051.88,3131.59 4051.88,3211.32 4127.67,3287.11 4157.2,3287.11 4255.62,3385.53 v2(4255.62,3386.51) ; U2.D7@4172.95,3776.28 4172.95,3807.78 4180.82,3815.65 4256.61,3815.65 v2(4286.14,3786.12)
  Bottom Layer w6: v2(4255.62,3386.51) 4258.58,3383.56 4282.2,3383.56 4291.06,3392.42 4291.06,3403.25 4284.17,3410.14 4253.66,3410.14 4246.77,3417.03 4246.77,3426.87 4254.64,3434.74 4283.18,3434.74 4288.11,3439.66 4288.11,3447.54 4282.2,3453.44 4251.69,3453.44 4246.77,3458.37 4246.77,3467.22 4253.66,3474.11 4322.55,3474.11 4337.32,3488.88 4337.32,3738.88 4292.04,3784.15 v2@4291.06,3784.15
DDR3_DQ9: U1.E3 U2.C3 | length 1288.3
  Top Layer w6: U1.E3@4023.57,2988.77 4038.96,3004.15 4038.96,3077.25 4081.28,3119.57 4081.28,3156.97 4108.84,3184.53 4108.84,3213.07 4295.85,3400.08 4295.85,3430.59 4381.48,3516.22 4381.48,3531.97 4376.56,3536.89 4362.78,3536.89 4355.89,3543.78 4355.89,3552.64 4361.79,3558.55 4375.57,3558.55 4381.48,3564.45 4381.48,3574.29 4375.57,3580.2 4360.81,3580.2 4355.89,3585.12 4355.89,3593.98 4361.79,3599.88 4374.59,3599.88 4380.49,3605.79 4380.49,3854.81 v2@4355.89,3879.41 ; U2.C3@4204.31,3904.02 4204.31,3902.05 v2@4220.06,3886.3
  Bottom Layer w6: v2@4220.06,3886.3 4350.97,3886.3 v2(4357.86,3879.41)
  other v2: 4220.06,3885.32
DDR3_DQ10: U1.G3 U2.C8 | length 1305.6
  Top Layer w6: U1.G3@3960.27,2988.77 3974.93,3003.43 v2(3975.97,3003.43) ; v2@3987.78,3171.73 v2(3986.79,3171.73) 3986.79,3316.42 4006.48,3336.11 4016.32,3336.11 4029.11,3323.31 4038.96,3323.31 4044.86,3329.22 4044.86,3338.07 4031.08,3351.85 4031.08,3359.73 4037.97,3366.62 4045.85,3366.62 4059.63,3352.84 4069.47,3352.84 4075.37,3358.74 4075.37,3367.6 4059.63,3383.35 4059.63,3388.27 4186.6,3515.24 v2(4191.52,3515.24) ; U2.C8@4204.31,3743.59 4205.3,3743.59 v2(4220.06,3728.82)
  Bottom Layer w6: v2(3975.97,3003.43) 3991.71,3019.18 3991.71,3164.85 v2@3988.76,3167.8 ; v2@4187.58,3515.24 4175.77,3515.24 4162.97,3528.03 4162.97,3572.33 4169.86,3579.22 4178.72,3579.22 4182.66,3575.28 4182.66,3536.89 4184.63,3534.92 4200.37,3534.92 4202.34,3536.89 4202.34,3553.62 4208.25,3559.53 4218.09,3559.53 4223.01,3554.61 4223.01,3504.41 4227.93,3499.49 4237.78,3499.49 4241.71,3503.43 4241.71,3548.7 4252.54,3559.53 4273.21,3559.53 4282.07,3568.39 4282.07,3601.85 4276.16,3607.76 4267.3,3607.76 4261.4,3613.66 4261.4,3659.92 4234.82,3686.5 4234.82,3715.04 4221.04,3728.82 v2(4220.06,3728.82)
DDR3_DQ11: U1.H3 U2.C2 | length 1288.3
  Top Layer w6: U1.H3@3928.62,2988.77 3928.82,2988.77 v2@3943.49,3003.43 ; v2(3946.44,3136.3) 3967.11,3156.97 3967.11,3322.33 4205.3,3560.51 4245.65,3560.51 4345.06,3659.92 4345.06,3829.22 4325.37,3848.9 4325.37,3939.45 4315.83,3949 4217.8,3949 U2.C2@4204.31,3935.51
  Bottom Layer w6: v2@3942.5,3001.46 v2(3944.47,3003.43) 3944.47,3066.43 3944.22,3066.68 3944.22,3134.08 v2(3946.44,3136.3)
DDR3_DQ12: U1.J3 U2.A7 | length 1285.6
  Top Layer w6: U1.J3@3898.31,2988.77 3898.31,2989.01 3912.73,3003.43 v2(3913,3003.43) ; v2(3901.16,3190.44) 3901.16,3355.79 4031.08,3485.71 4031.08,3673.7 4036.99,3679.61 4046.83,3679.61 4051.75,3674.69 4051.75,3629.41 4054.71,3626.46 4066.52,3626.46 4071.44,3631.38 4071.44,3675.67 4077.34,3681.58 4083.25,3681.58 4090.14,3674.69 4090.14,3643.19 4095.06,3638.27 4104.9,3638.27 4110.81,3644.18 4110.81,3673.7 4117.7,3680.59 4282.07,3680.59 4300.77,3699.29 4300.77,3743.59 4268.29,3776.07 U2.A7@4267.3,3776.07
  Bottom Layer w6: v2@3901.16,3186.5 3901.16,3074.29 3912.97,3062.48 v2@3912.97,3003.45
DDR3_DQ13: U1.H2 U2.A2 | length 1285
  Top Layer w6: U1.H2@3928.75,3020.43 3913.11,3036.07 3913.11,3157.18 3935.74,3179.82 3935.74,3340.26 4061.73,3466.24 4061.73,3550.89 4162.12,3651.28 4302.87,3651.28 4330.43,3678.84 4330.43,3805.81 4286.14,3850.1 4286.14,3863.88 4291.06,3868.8 4303.85,3868.8 4310.74,3875.69 4310.74,3886.51 4306.81,3890.45 4292.04,3890.45 4286.14,3896.36 4286.14,3905.22 4293.03,3912.11 4306.81,3912.11 4310.74,3916.04 4310.74,3926.87 4302.87,3934.74 U2.A2@4270.39,3934.74
DDR3_DQ14: U1.H1 U2.B8 | length 1300.3
  Top Layer w6: U1.H1@3929.06,3051.67 3929.06,3148.02 3950.82,3169.78 3950.82,3330.21 4086.64,3466.04 4086.64,3480.8 4076.8,3490.64 4076.8,3501.47 4082.71,3507.38 4090.58,3507.38 4103.38,3494.58 4116.17,3494.58 4120.11,3498.52 4120.11,3506.39 4085.66,3540.84 4085.66,3548.72 4093.53,3556.59 4100.42,3556.59 4134.87,3522.14 4144.72,3522.14 4150.62,3528.05 4150.62,3538.87 4113.22,3576.27 4113.22,3582.18 4120.11,3589.07 4128.97,3589.07 4164.4,3553.64 4174.24,3553.64 4180.15,3559.54 4180.15,3567.42 4154.56,3593.01 4154.56,3616.63 4168.34,3630.41 4189.99,3630.41 4196.88,3623.52 4196.88,3607.77 4203.77,3600.88 4214.6,3600.88 4218.53,3604.82 4218.53,3622.53 4226.41,3630.41 4233.3,3630.41 4239.2,3624.5 4239.2,3605.8 4244.13,3600.88 4253.97,3600.88 4259.87,3606.79 4259.87,3625.49 4263.81,3629.42 v2(4280.54,3629.42) ; U2.B8@4236.25,3743.6 4251.01,3728.83 v2(4252,3728.83)
  Bottom Layer w6: v2(4252,3728.83) 4253.97,3728.83 4269.72,3713.09 4269.72,3683.56 4282.51,3670.76 v2@4282.51,3631.39
DDR3_DQ15: U1.J1 U2.A3 | length 1294.5
  Top Layer w6: U1.J1@3896.86,3052.8 3896.86,3162.78 3921.72,3187.64 3921.72,3353 4045.74,3477.01 4045.74,3555.75 4155.97,3665.99 4284.91,3665.99 4315.42,3696.5 4315.42,3787.05 4257.35,3845.12 4175.66,3845.12 4170.74,3850.05 4170.74,3860.87 4176.64,3866.78 4259.32,3866.78 4267.19,3874.65 U2.A3@4267.19,3902.21
DDR3_DQS0_N: U1.B2 U2.G3 | length 1283.6
  Top Layer w6: v2(4068.62,3880.61) 4077.48,3880.61 4084.36,3887.5 4084.36,3898.33 U2.G3@4078.46,3904.23 ; U1.B2@4118.66,3020.43 4134.56,3036.33 4134.56,3078.44 4162.12,3106 4162.12,3186.71 4358.97,3383.56 v2(4372.75,3383.56)
  Bottom Layer w6: v2(4068.62,3880.61) 4077.48,3880.61 4091.25,3894.39 4121.77,3894.39 4175.9,3840.26 4317.63,3840.26 4391.45,3766.44 4391.45,3416.04 4374.72,3399.31 v2@4374.72,3385.53
DDR3_DQS0_P: U1.C2 U2.F3 | length 1286.6
  Top Layer w6: U1.C2@4087.01,3020.43 4102.08,3035.5 4102.08,3060.74 4101.83,3060.99 4101.83,3079.18 4113.89,3091.24 4126.69,3091.24 4149.33,3113.88 4149.33,3192.62 4347.16,3390.45 v2(4347.16,3409.15) ; v2(4091.25,3857.97) 4091.25,3869.78 4106.02,3884.55 4106.02,3900.29 U2.F3@4109.96,3904.23
  Bottom Layer w6: v2@4091.25,3860.92 4091.25,3871.75 4101.1,3881.59 4116.85,3881.59 4171.96,3826.48 4310.74,3826.48 4378.66,3758.56 4378.66,3419 4368.81,3409.15 v2(4347.16,3409.15)
DDR3_DQS1_N: U1.F2 U2.B7 | length 1284.8
  Top Layer w6: U1.F2@3992.05,3020.43 3977.08,3035.4 3977.08,3107.97 4018.42,3149.31 4018.42,3255.61 4081.41,3318.6 4109.96,3318.6 4126.69,3335.33 4126.69,3356 4107.99,3374.7 4107.99,3383.56 4115.86,3391.44 4125.7,3391.44 4152.28,3364.86 4170.98,3364.86 4184.76,3378.64 4184.76,3398.33 4156.22,3426.87 4156.22,3437.7 4161.14,3442.62 4169.01,3442.62 4196.57,3415.06 4216.25,3415.06 4230.03,3428.84 4230.03,3446.55 4209.36,3467.22 4209.36,3486.91 4213.3,3490.85 4229.05,3490.85 4239.88,3480.02 4257.59,3480.02 4275.31,3497.74 v2@4292.04,3497.74 ; v2(4221.18,3793.01) 4221.18,3791.04 U2.B7@4235.94,3776.28
  Bottom Layer w6: v2(4221.18,3793.01) 4212.32,3784.15 4212.32,3776.28 4226.1,3762.5 4293.03,3762.5 4314.68,3740.85 4314.68,3536.12 4294.99,3516.44 v2@4294.99,3503.64
  other v2: 4294.01,3497.74
DDR3_DQS1_P: U1.G2 U2.C7 | length 1294.4
  Top Layer w6: U1.G2@3960.4,3020.43 3944.35,3036.48 3944.35,3094.92 4006.61,3157.18 4006.61,3260.53 4078.46,3332.38 4103.07,3332.38 4112.91,3342.22 4112.91,3351.08 4095.19,3368.8 4095.19,3391.44 4108.97,3405.22 4128.66,3405.22 4155.23,3378.64 4166.06,3378.64 4171.96,3384.55 4171.96,3391.44 4141.45,3421.95 4141.45,3440.65 4157.2,3456.4 4173.93,3456.4 4201.49,3428.84 4211.33,3428.84 4216.25,3433.76 4216.25,3442.62 4196.57,3462.3 4196.57,3491.83 4208.38,3503.64 4233.97,3503.64 4244.8,3492.81 4252.67,3492.81 4268.42,3508.56 v2(4268.42,3522.34) ; v2(4189.68,3793.01) 4189.68,3791.04 U2.C7@4204.44,3776.28
  Bottom Layer w6: v2@4192.63,3791.04 4200.51,3783.17 4200.51,3770.37 4222.16,3748.72 4288.11,3748.72 4301.88,3734.94 4301.88,3541.04 4283.18,3522.34 v2(4268.42,3522.34)
DDR3_ODT: U1.N5 U2.K1
DDR3_RAS: U1.P4 U2.J3 | length 1666.6
  Top Layer w6: v2(3646.24,3095.79) 3651.16,3100.71 3726.95,3100.71 3741.71,3085.95 3741.71,3079.06 3725.49,3059.31 3725.49,2974.31 U1.P4@3738.71,2957.17 ; v2(3691.55,3743.72) 3691.55,3770.3 3755.53,3834.27 3918.92,3834.27 3929.74,3845.1 3976,3845.1 3985.84,3854.94 v2(3985.84,3878.56) 3989.78,3878.56 U2.J3@4015.37,3904.16
  Bottom Layer w6: v2@3647.22,3096.78 3647.22,3133.19 3565.53,3214.89 3565.53,3286.99 3565.57,3287.03 3565.57,3288.01 3520.29,3333.29 3520.29,3761.44 3528.17,3769.31 3598.05,3769.31 3605.92,3761.44 3605.92,3721.08 3613.8,3713.21 3621.67,3713.21 3627.58,3719.12 3627.58,3760.45 3635.45,3768.33 3643.33,3768.33 3648.25,3763.41 3648.25,3749.63 3654.15,3743.72 v2@3687.62,3743.72 ; v2@3982.89,3878.56 v2@3985.84,3875.61
DDR3_RESET: R1.1 U1.B4 U2.T2 | length 1362
  Top Layer w6: v2(3770.25,3934.38) 3793.88,3934.38 U2.T2@3794.86,3935.36 ; v2(4101.95,2941.27) 4102.62,2941.27 U1.B4@4118.52,2957.17
  Bottom Layer w6: R1.1@3754,3990.54 3754,3950.63 v2(3770.25,3934.38) 3803.72,3900.91 3933.64,3900.91 4032.07,3802.49 4032.07,3739.49 4046.58,3724.98 4046.58,3594.08 4066.51,3574.14 4066.51,3463.9 4081.28,3449.14 4081.28,3130.24 4138.37,3073.16 4138.37,3040.67 4086.93,2989.24 4086.93,2953.33 4099,2941.27 v2(4101.95,2941.27)